# Altium PCB PCB1.PcbDoc (part 1 of 2)
Units mm, origin at the board's own origin, x right, y up, seen from the top; angles counter-clockwise.
Board outline 71.14 x 54.36 mm, 2 copper layers (Top Layer, Bottom Layer); 19 components, 50 nets, 188 pads, 100 vias.
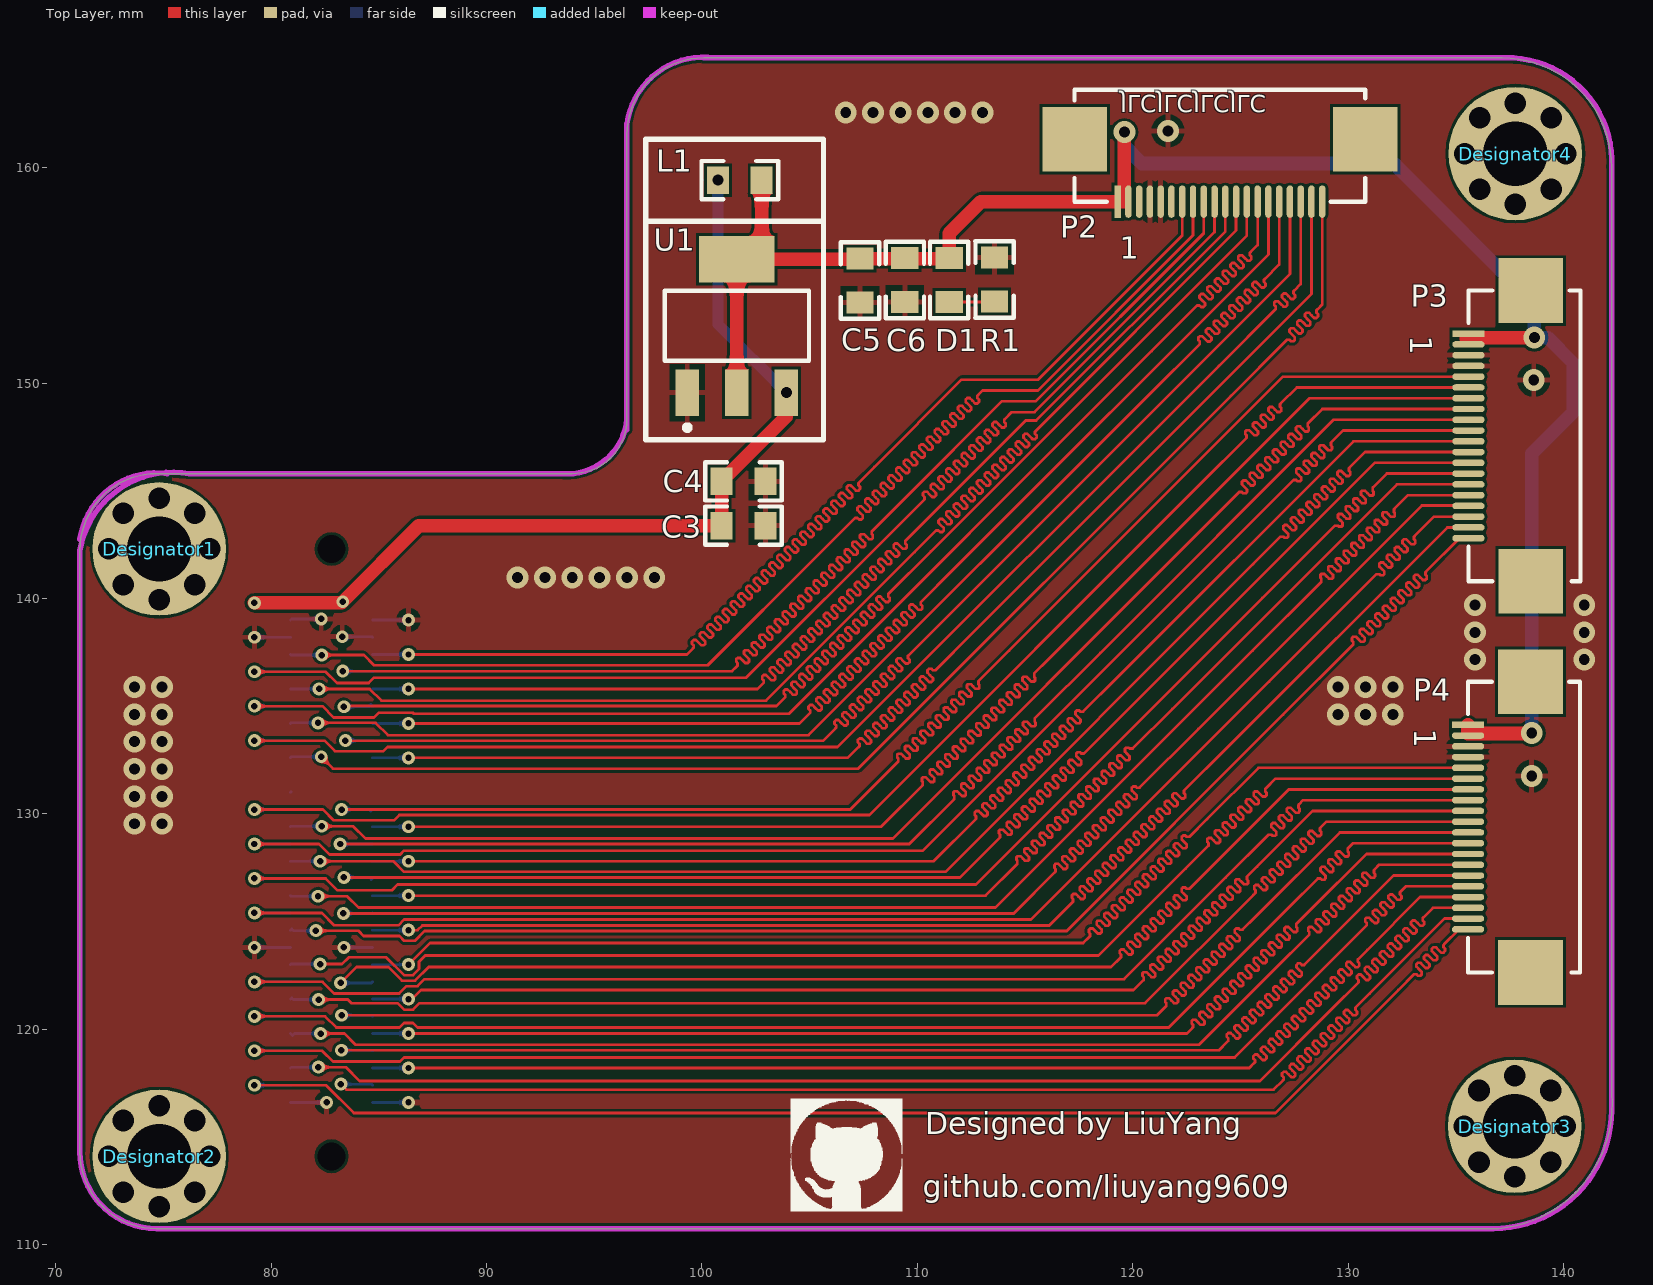
[diagram p0: Top Layer view]
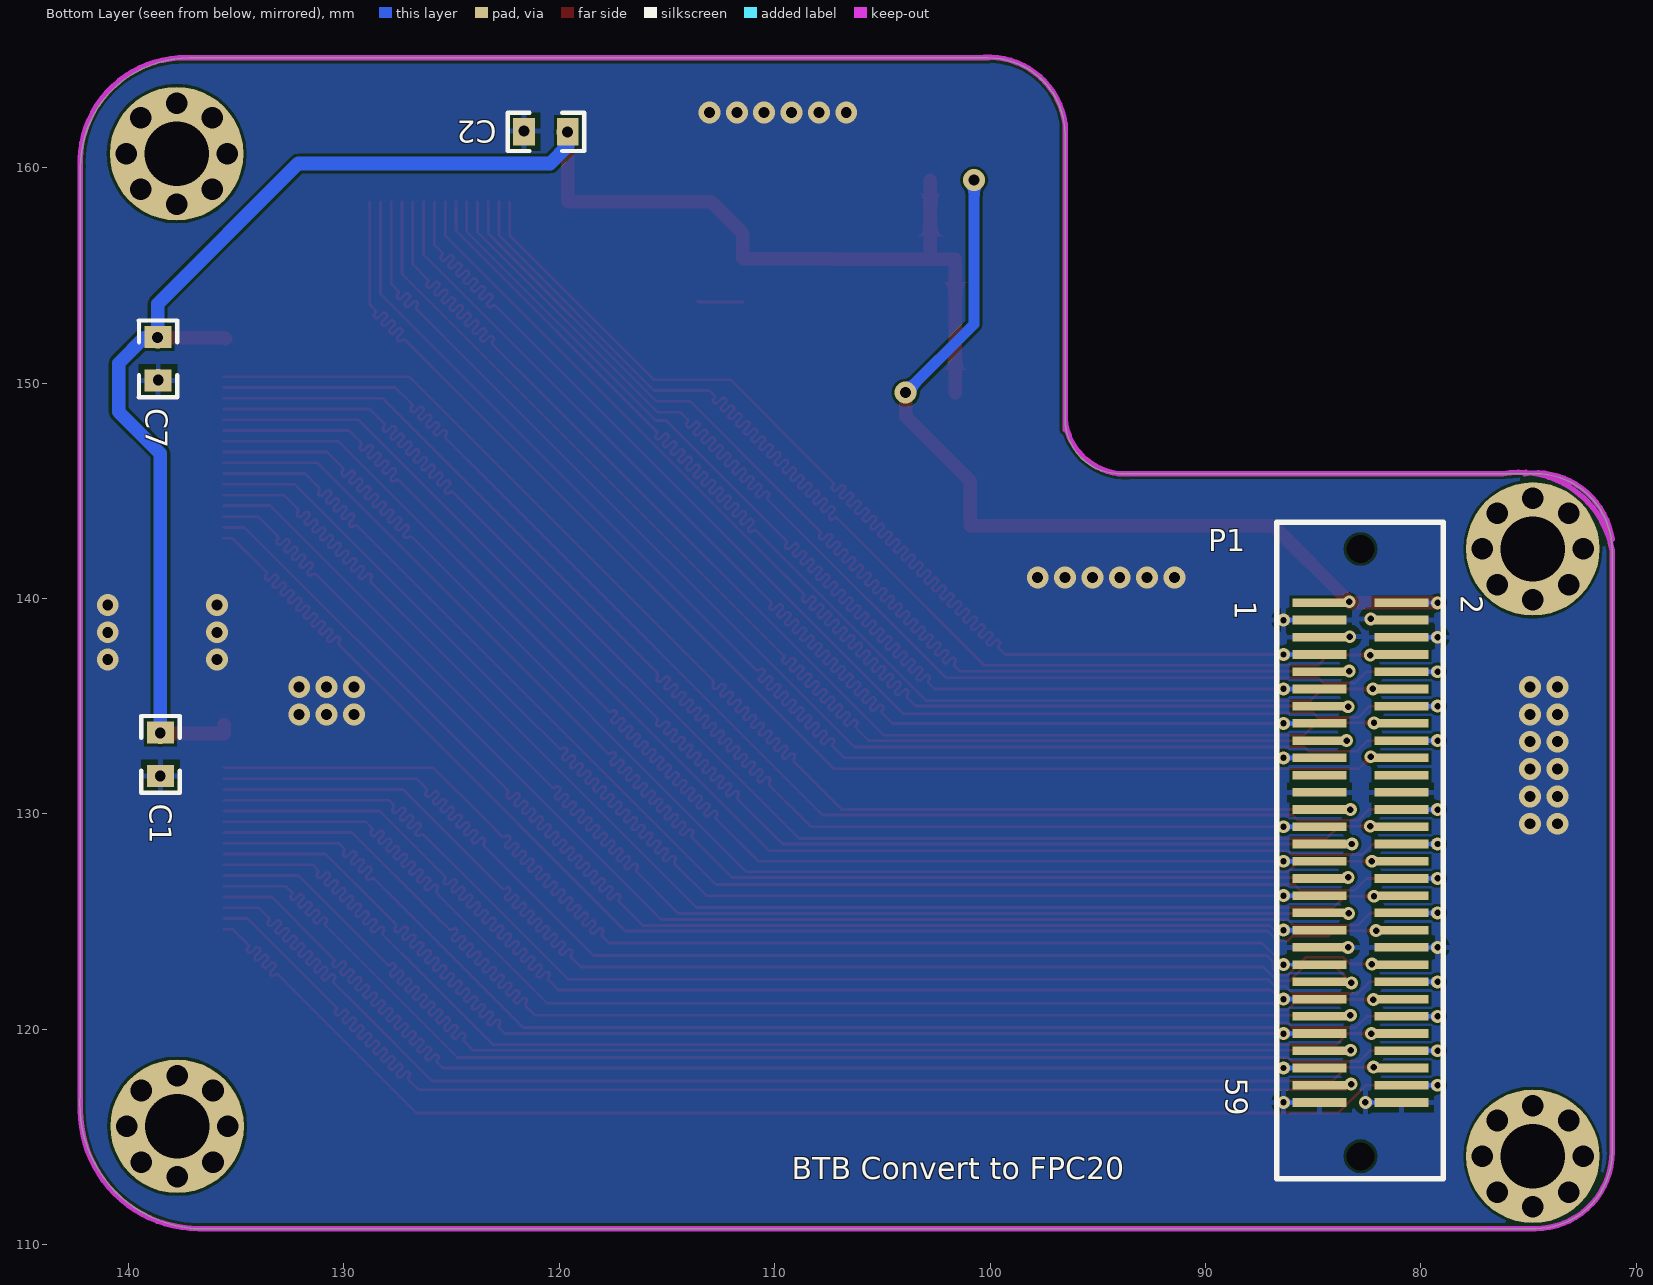
[diagram p1: Bottom Layer view, seen from below]
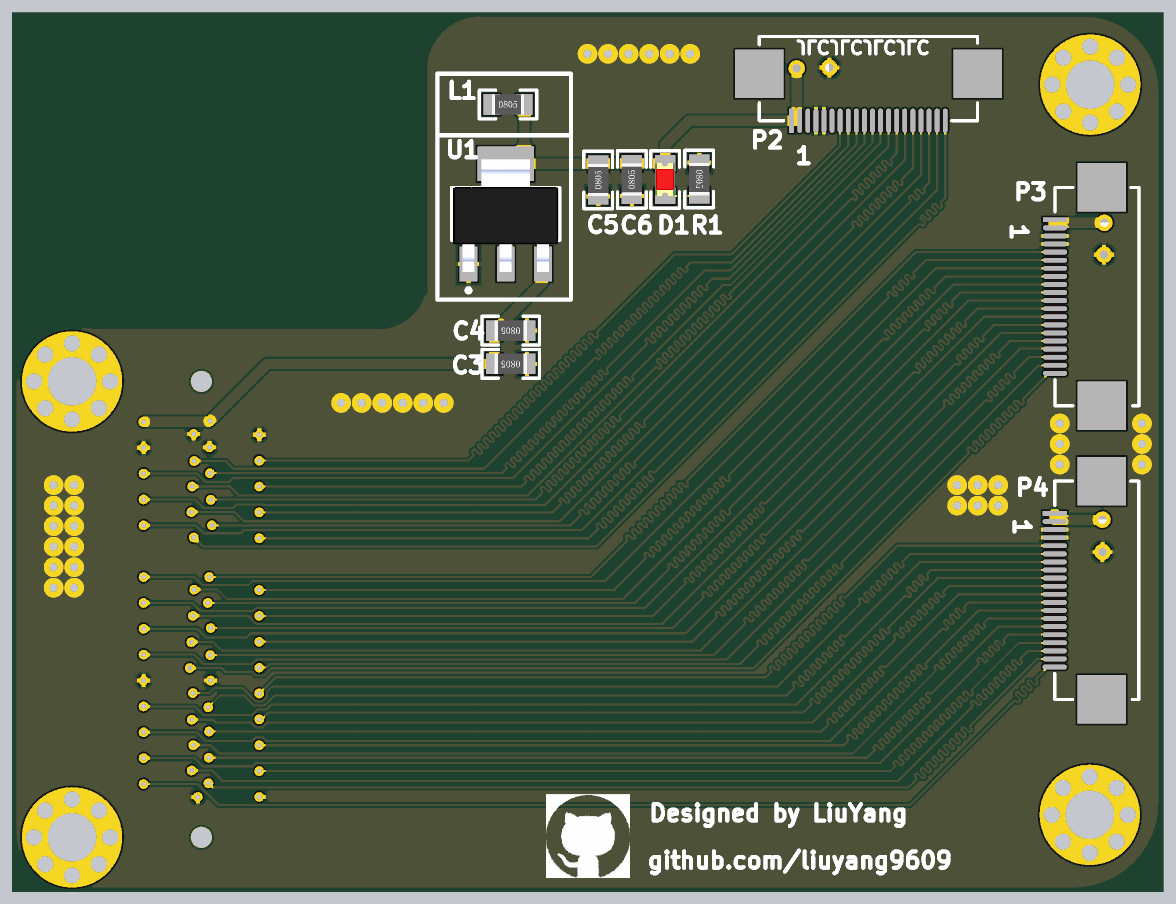
[diagram p3: 3D render of the assembled board from above, using the file's embedded part models]
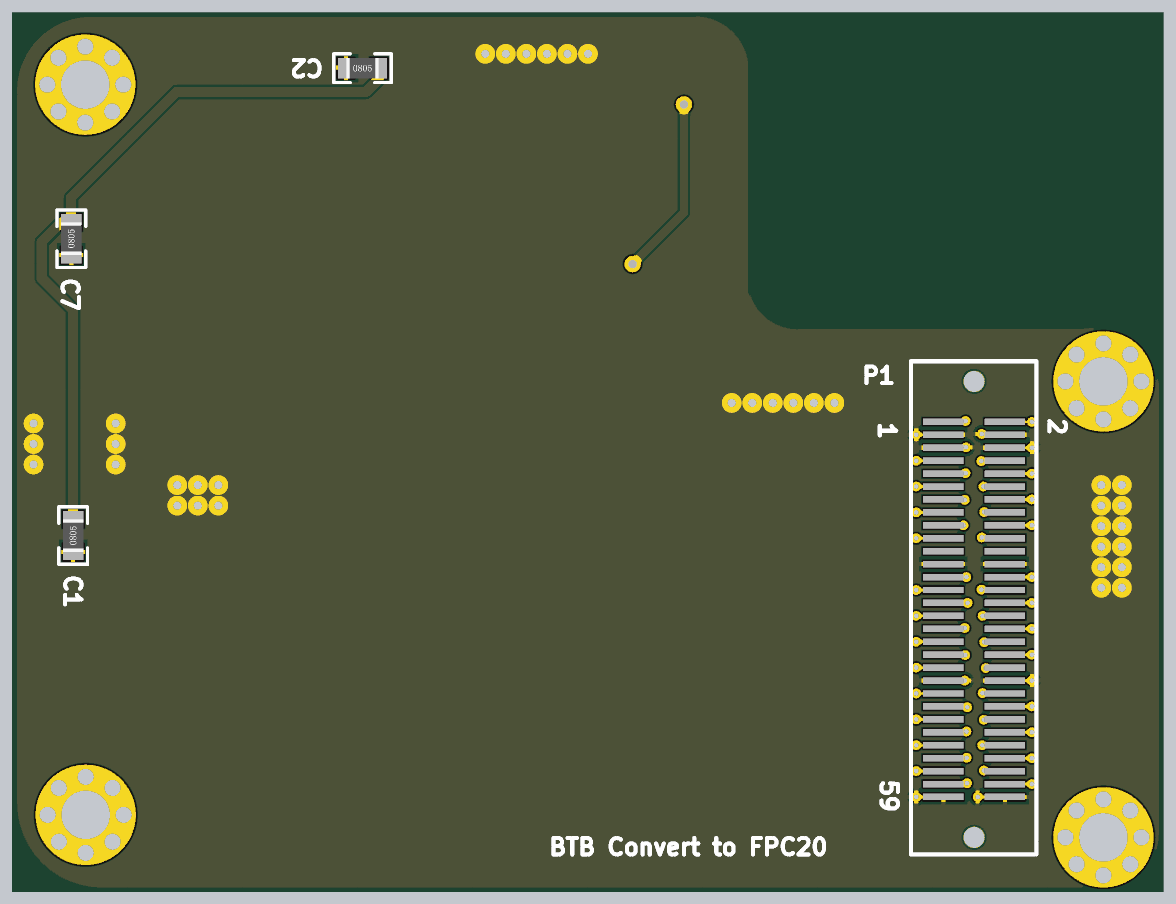
[diagram p4: 3D render of the assembled board from below, using the file's embedded part models]

## Layer stack, top to bottom
Top Solder: solder mask 0.0102, Solder Resist, Dk 3.5
Top Layer: signal copper 0.0356
Dielectric 1: dielectric 0.32, FR-4, Dk 4.8
Bottom Layer: signal copper 0.0356
Bottom Solder: solder mask 0.0102, Solder Resist, Dk 3.5

## Board outline
74.676,110.744 cw(c74.676,114.3) 71.12,114.3 71.12,142.24 cw(c74.676,142.24) 74.676,145.796 93.98,145.796 ccw(c93.98,148.336) 96.52,148.336 96.52,161.544 cw(c100.076,161.544) 100.076,165.1 137.16,165.1 cw(c137.16,160.02) 142.24,160.02 142.24,117 cw(c136.492,116.492) 137,110.744

## Design rules (kind name [scope] priority, off if disabled: settings)
Clearance [All] p1: gap=0.127
Length FPC3Length [InNetClass('FPC3')] p1: maxlimit=66 minlimit=65
Length FPC2 [InNetClass('FPC2')] p2: maxlimit=71 minlimit=70
Length FPC1_Length [InNetClass('FPC1')] p3: maxlimit=66 minlimit=65
PolygonConnect [All] p1: connectstyle=Relief reliefconductorwidth=0.254 reliefentries=4 polygonreliefangle="90 Angle" airgapwidth=0.254
RoutingVias [All] p1: holewidth=0.3 width=0.6 viastyle="Through Hole" minholewidth=0.3 minwidth=0.6 maxholewidth=100 maxwidth=100
SolderMaskExpansion [All] p1: expansion=0.102
Width [All] p1: maxlimit=1.27 minlimit=0.127 preferedwidth=0.127
30 further rules are at their usual default settings.

## Classes and differential pairs
component class Sheet1: C1 C2 C3 C4 C5 C6 C7 D1 L1 P1 P2 P4 R1 U1
net class FPC1: N17 N20 P18 P20 R18 T17 T20 U20 V20 W18 W19 W20 Y18 Y19
net class FPC2: N18 P15 P16 P19 R16 R17 T16 U17 U18 U19 V15 V16 V17 V18 W15 W16
net class FPC3: P14 R14 T10 T11 T12 T14 T15 U12 U14 U15 V12 W13 W14 Y14 Y16 Y17

## Components (designator, comment, footprint, x,y, rotation, side; value= is the part's Value field where it differs from the comment)
C1 "Cap" R0805 138.519,132.766 r90 bottom
C2 "Cap" R0805 120.625,161.671 r180 bottom
C3 "Cap" R0805 101.93,143.383 r180 top
C4 "Cap" R0805 101.93,145.44 r180 top
C5 "Cap" R0805 107.34,154.762 r90 top
C6 "Cap" R0805 109.423,154.788 r90 top
C7 "Cap" R0805 138.633,151.13 r90 bottom
D1 "LED" LED0805红 111.481,154.788 r270 top
Designator1 "Comment" 定位孔 74.8,142.3 r0 top
Designator2 "Comment" 定位孔 74.8,114.1 r0 top
Designator3 "Comment" 定位孔 137.744,115.494 r0 top
Designator4 "Comment" 定位孔 137.77,160.655 r0 top
L1 "Inductor" R0805 101.76,159.427 r0 top
P1 "BTB 30X2" BTBCON_0.8mm_60P 84.7,139.8 r180 bottom
P2 "FPC20P" FPC20Pin 119.303,158.427 r90 top
P3 "FPC20P" FPC20Pin 135.592,152.299 r0 top
P4 "FPC20P" FPC20Pin 135.575,134.136 r0 top
R1 "Res1" R0805 113.589,154.813 r270 top
U1 "AMS1117" "SOT-223   AMS1117" 101.62,152.658 r0 top

## Footprints (in the part's own frame and the unit in brackets; to place one, negate y for a bottom-side part, rotate by r counter-clockwise, add the part's x,y. Pads: shape width x height; smd on the part's side, far side on the other; paste and mask are expansions set on the pad)
BTBCON_0.8mm_60P [mm]
  rect 2.5x0.4 smd: 1(0,0) 2(3.8,0) 3(0,-0.8) 4(3.8,-0.8) 5(0,-1.6) 6(3.8,-1.6) 7(0,-2.4) 8(3.8,-2.4) 9(0,-3.2) 10(3.8,-3.2) 11(0,-4) 12(3.8,-4) 13(0,-4.8) 14(3.8,-4.8) 15(0,-5.6) 16(3.8,-5.6) 17(0,-6.4) 18(3.8,-6.4) 19(0,-7.2) 20(3.8,-7.2) 21(0,-8) 22(3.8,-8) 23(0,-8.8) 24(3.8,-8.8) 25(0,-9.6) 26(3.8,-9.6) 27(0,-10.4) 28(3.8,-10.4) 29(0,-11.2) 30(3.8,-11.2) 31(0,-12) 32(3.8,-12) 33(0,-12.8) 34(3.8,-12.8) 35(0,-13.6) 36(3.8,-13.6) 37(0,-14.4) 38(3.8,-14.4) 39(0,-15.2) 40(3.8,-15.2) 41(0,-16) 42(3.8,-16) 43(0,-16.8) 44(3.8,-16.8) 45(0,-17.6) 46(3.8,-17.6) 47(0,-18.4) 48(3.8,-18.4) 49(0,-19.2) 50(3.8,-19.2) 51(0,-20) 52(3.8,-20) 53(0,-20.8) 54(3.8,-20.8) 55(0,-21.6) 56(3.8,-21.6) 57(0,-22.4) 58(3.8,-22.4) 59(0,-23.2) 60(3.8,-23.2)
  round 1 hole 1.3: 61(1.9,2.5) 62(1.9,-25.7)
  silkscreen extent -2,-26.75 5.75,3.75
FPC20Pin [mm]
  rect 1.5x0.3 smd: 1(0,0)
  oval 1.5x0.3 smd: 2(0,-0.5) 3(0,-1) 4(0,-1.5) 5(0,-2) 6(0,-2.5) 7(0,-3) 8(0,-3.5) 9(0,-4) 10(0,-4.5) 11(0,-5) 12(0,-5.5) 13(0,-6) 14(0,-6.5) 15(0,-7) 16(0,-7.5) 17(0,-8) 18(0,-8.5) 19(0,-9) 20(0,-9.5)
  rect 3x3 smd: 21(2.9,2) 22(2.9,-11.5)
  silkscreen extent 0,-11.5 5.2,2
LED0805红 [mil]
  rect 40x50 smd: 1(-40,0) 2(40,0)
  silkscreen extent -70,-35 70,35, body extent -40,-25 40,24, height 43
R0805 [mil]
  rect 40x50 smd: 1(-40,0) 2(40,0)
  silkscreen extent -70,-35 70,35, body extent -39,-25 39,25, height 22
"SOT-223   AMS1117" [mm] "SOT-223/SC-73; 4 Leads; Body 6.7 x 7.3 mm, inc. leads (LxW max)"
  rect 1.1x2.15 smd: 1(-2.3,-3.1) 2(0,-3.1) 3(2.3,-3.1)
  rect 3.5x2.15 smd: 4(0,3.1)
  silkscreen extent -3.35,-4.85 3.35,1.63, body extent -3.25,-3.58 3.25,3.38, height 1.65
定位孔 [mm]
  round 1 hole 1: 1(-2.35,0) 1(-1.662,-1.662) 1(-1.662,1.662) 1(0,-2.35) 1(0,2.35) 1(1.662,-1.662) 1(1.662,1.662) 1(2.35,0)
  round 6.2 hole 3: 1(0,0)

## Part data
C1 C2 C3 C4 C5 C6 C7: "Capacitor"
D1: library part LED0, "Typical INFRARED GaAs LED"
P1: library part "Header 30X2", "Header, 30-Pin, Dual row"
P2 P3 P4: library part "Header 22", "Header, 22-Pin"
R1: "Resistor"

## Via types
v1: diameter 0.6, hole 0.3, Top Layer to Bottom Layer, 56 vias
v2: diameter 1.016, hole 0.508, Top Layer to Bottom Layer, 44 vias

## Nets (pads, with @x,y where several pads share a name; then routed paths per layer and width w, separated by ;. In a path a pad name is that pad's centre, name@x,y a point inside that pad or via, vN(x,y) a via of type N, cw(c..) or ccw(c..) an arc to the next point about the centre after c; other vN are vias at no path point)
DGND: C1.1 C2.1 C3.1 C4.1 C5.1 C6.1 C7.1 P1.3 P1.4 P1.5 P1.6 P1.23 P1.24 P1.41 P1.42 P1.59 P1.60 P2.4 P2.5 P3.3 P3.4 P4.3 P4.4 R1.1 U1.1 | length 12.6
  Bottom Layer w0.127: v1(79.223,123.8) P1.42@80.9,123.8 ; v1(79.223,138.2) P1.6@80.9,138.2 ; P1.60@80.9,116.6 v1(82.577,116.6) ; P1.24@80.9,131 P1.24@80.925,131.025 ; P1.4@80.9,139 80.95,139.05 v1(82.325,139.05) ; v1(83.3,138.225) 84.675,138.225 P1.5@84.7,138.2 ; v1(83.375,123.8) P1.41@84.7,123.8 ; P1.59@84.7,116.6 v1(86.377,116.6) ; P1.3@84.7,139 v1(86.377,139)
  other v2: 73.66,129.54 74.93,129.54 73.66,130.81 74.93,130.81 138.531,131.752 73.66,132.08 74.93,132.08 73.66,133.35 74.93,133.35 73.66,134.62 74.93,134.62 129.54,134.62 130.81,134.62 132.08,134.62 73.66,135.89 74.93,135.89 129.54,135.89 130.81,135.89 132.08,135.89 135.89,137.16 140.97,137.16 135.89,138.43 140.97,138.43 135.89,139.7 140.97,139.7 91.44,140.97 92.71,140.97 93.98,140.97 95.25,140.97 96.52,140.97 97.79,140.97 138.624,150.137 121.641,161.709 106.68,162.56 107.95,162.56 109.22,162.56 110.49,162.56 111.76,162.56 113.03,162.56
N17: P1.15 P2.15 | length 64.7
  Top Layer w0.127: v1(86.377,134.2) 104.533,134.2 104.991,134.658 105.027,134.694 105.027,134.802 104.955,134.874 104.955,134.981 105.027,135.053 105.135,135.053 105.26,134.928 105.386,134.802 105.494,134.802 105.566,134.874 105.566,134.981 105.44,135.107 105.314,135.233 105.314,135.341 105.386,135.412 105.494,135.412 105.62,135.287 105.745,135.161 105.853,135.161 105.925,135.233 105.925,135.341 105.799,135.466 105.673,135.592 105.673,135.7 105.745,135.772 105.853,135.772 105.979,135.646 106.104,135.52 106.212,135.52 106.284,135.592 106.284,135.7 106.158,135.826 106.033,135.951 106.033,136.059 106.104,136.131 106.212,136.131 106.338,136.005 106.464,135.879 106.571,135.879 106.643,135.951 106.643,136.059 106.518,136.185 106.392,136.31 106.392,136.418 106.464,136.49 106.571,136.49 106.697,136.364 106.823,136.239 106.931,136.239 107.002,136.31 107.002,136.418 106.877,136.544 106.751,136.67 106.751,136.777 106.823,136.849 106.931,136.849 107.056,136.724 107.182,136.598 107.29,136.598 107.362,136.67 107.362,136.777 107.236,136.903 107.11,137.029 107.11,137.137 107.182,137.208 107.29,137.208 107.416,137.083 107.541,136.957 107.649,136.957 107.721,137.029 107.721,137.137 107.595,137.262 107.469,137.388 107.469,137.496 107.541,137.568 107.649,137.568 107.775,137.442 107.901,137.316 108.008,137.316 108.08,137.388 108.08,137.496 107.954,137.622 107.829,137.747 107.829,137.855 107.901,137.927 108.008,137.927 108.134,137.801 108.26,137.675 108.367,137.675 108.439,137.747 108.439,137.855 108.314,137.981 108.188,138.107 108.188,138.214 108.26,138.286 108.367,138.286 108.493,138.16 108.619,138.035 108.727,138.035 108.799,138.107 108.799,138.214 108.673,138.34 108.547,138.466 108.547,138.573 108.619,138.645 108.727,138.645 108.852,138.52 108.978,138.394 109.086,138.394 109.158,138.466 109.158,138.573 109.032,138.699 108.906,138.825 108.906,138.933 108.978,139.005 109.086,139.005 109.212,138.879 109.337,138.753 109.445,138.753 109.517,138.825 109.517,138.933 109.391,139.058 109.266,139.184 109.266,139.292 109.337,139.364 109.445,139.364 109.571,139.238 109.697,139.112 109.804,139.112 109.876,139.184 109.876,139.292 109.75,139.418 109.625,139.543 109.625,139.651 109.697,139.723 109.804,139.723 109.93,139.597 110.056,139.472 110.164,139.472 110.235,139.543 110.235,139.651 110.164,139.723 110.164,139.831 111.671,141.338 126.303,155.971 P2.15@126.303,158.427
  Bottom Layer w0.127: P1.15@84.7,134.2 v1(86.377,134.2)
N18: P1.29 P3.9 | length 69.7
  Top Layer w0.127: v1(83.2,128.6) 109.626,128.6 111.697,130.67 111.714,130.688 111.714,130.832 111.679,130.868 111.679,131.012 111.714,131.047 111.858,131.047 111.966,130.94 112.074,130.832 112.217,130.832 112.253,130.868 112.253,131.012 112.146,131.119 112.038,131.227 112.038,131.371 112.074,131.407 112.217,131.407 112.325,131.299 112.433,131.191 112.577,131.191 112.612,131.227 112.612,131.371 112.505,131.479 112.397,131.586 112.397,131.73 112.433,131.766 112.577,131.766 112.684,131.658 112.792,131.55 112.936,131.55 112.972,131.586 112.972,131.73 112.864,131.838 112.756,131.945 112.756,132.089 112.792,132.125 112.936,132.125 113.044,132.017 113.151,131.91 113.295,131.91 113.331,131.945 113.331,132.089 113.223,132.197 113.115,132.305 113.115,132.448 113.151,132.484 113.295,132.484 113.403,132.377 113.511,132.269 113.654,132.269 113.69,132.305 113.69,132.448 113.582,132.556 113.475,132.664 113.475,132.808 113.511,132.844 113.654,132.844 113.762,132.736 113.87,132.628 114.013,132.628 114.049,132.664 114.049,132.808 113.942,132.915 113.834,133.023 113.834,133.167 113.87,133.203 114.013,133.203 114.121,133.095 114.229,132.987 114.373,132.987 114.409,133.023 114.409,133.167 114.301,133.275 114.193,133.382 114.193,133.526 114.229,133.562 114.373,133.562 114.48,133.454 114.588,133.346 114.732,133.346 114.768,133.382 114.768,133.526 114.66,133.634 114.552,133.742 114.552,133.885 114.588,133.921 114.732,133.921 114.84,133.813 114.947,133.706 115.091,133.706 115.127,133.742 115.127,133.885 115.019,133.993 114.911,134.101 114.911,134.244 114.947,134.28 115.091,134.28 115.199,134.173 115.307,134.065 115.45,134.065 115.486,134.101 115.486,134.244 115.45,134.28 115.45,134.424 118.504,137.477 129.325,148.299 P3.9@135.592,148.299
  Bottom Layer w0.127: v1(83.2,128.6) P1.29@84.7,128.6
N20: P1.7 P2.7 | length 64.7
  Top Layer w0.127: v1(86.377,137.4) 99.3,137.4 99.581,137.681 99.617,137.717 99.617,137.824 99.545,137.896 99.545,138.004 99.617,138.076 99.724,138.076 99.85,137.95 99.976,137.824 100.084,137.824 100.155,137.896 100.155,138.004 100.03,138.13 99.904,138.255 99.904,138.363 99.976,138.435 100.084,138.435 100.209,138.309 100.335,138.184 100.443,138.184 100.515,138.255 100.515,138.363 100.389,138.489 100.263,138.615 100.263,138.722 100.335,138.794 100.443,138.794 100.569,138.669 100.694,138.543 100.802,138.543 100.874,138.615 100.874,138.722 100.748,138.848 100.622,138.974 100.622,139.082 100.694,139.153 100.802,139.153 100.928,139.028 101.053,138.902 101.161,138.902 101.233,138.974 101.233,139.082 101.107,139.207 100.982,139.333 100.982,139.441 101.053,139.513 101.161,139.513 101.287,139.387 101.413,139.261 101.52,139.261 101.592,139.333 101.592,139.441 101.467,139.567 101.341,139.692 101.341,139.8 101.413,139.872 101.52,139.872 101.646,139.746 101.772,139.62 101.88,139.62 101.951,139.692 101.951,139.8 101.826,139.926 101.7,140.051 101.7,140.159 101.772,140.231 101.88,140.231 102.005,140.105 102.131,139.98 102.239,139.98 102.311,140.051 102.311,140.159 102.185,140.285 102.059,140.411 102.059,140.518 102.131,140.59 102.239,140.59 102.365,140.465 102.49,140.339 102.598,140.339 102.67,140.411 102.67,140.518 102.544,140.644 102.418,140.77 102.418,140.878 102.49,140.95 102.598,140.95 102.724,140.824 102.85,140.698 102.957,140.698 103.029,140.77 103.029,140.878 102.903,141.003 102.778,141.129 102.778,141.237 102.85,141.309 102.957,141.309 103.083,141.183 103.209,141.057 103.316,141.057 103.388,141.129 103.388,141.237 103.263,141.363 103.137,141.488 103.137,141.596 103.209,141.668 103.316,141.668 103.442,141.542 103.568,141.416 103.676,141.416 103.748,141.488 103.748,141.596 103.622,141.722 103.496,141.848 103.496,141.955 103.568,142.027 103.676,142.027 103.801,141.901 103.927,141.776 104.035,141.776 104.107,141.848 104.107,141.955 103.981,142.081 103.855,142.207 103.855,142.315 103.927,142.386 104.035,142.386 104.161,142.261 104.286,142.135 104.394,142.135 104.466,142.207 104.466,142.315 104.34,142.44 104.215,142.566 104.215,142.674 104.286,142.746 104.394,142.746 104.52,142.62 104.646,142.494 104.753,142.494 104.825,142.566 104.825,142.674 104.699,142.799 104.574,142.925 104.574,143.033 104.646,143.105 104.753,143.105 104.879,142.979 105.005,142.853 105.113,142.853 105.184,142.925 105.184,143.033 105.059,143.159 104.933,143.284 104.933,143.392 105.005,143.464 105.113,143.464 105.238,143.338 105.364,143.213 105.472,143.213 105.544,143.284 105.544,143.392 105.418,143.518 105.292,143.644 105.292,143.751 105.364,143.823 105.472,143.823 105.597,143.697 105.723,143.572 105.831,143.572 105.903,143.644 105.903,143.751 105.777,143.877 105.651,144.003 105.651,144.111 105.723,144.182 105.831,144.182 105.957,144.057 106.082,143.931 106.19,143.931 106.262,144.003 106.262,144.111 106.136,144.236 106.011,144.362 106.011,144.47 106.082,144.542 106.19,144.542 106.316,144.416 106.442,144.29 106.549,144.29 106.621,144.362 106.621,144.47 106.495,144.595 106.37,144.721 106.37,144.829 106.442,144.901 106.549,144.901 106.675,144.775 106.801,144.649 106.909,144.649 106.98,144.721 106.98,144.829 106.855,144.955 106.729,145.08 106.729,145.188 106.801,145.26 106.909,145.26 107.034,145.134 107.16,145.009 107.268,145.009 107.34,145.08 107.34,145.188 107.268,145.26 107.268,145.368 108.013,146.113 112.062,150.162 115.618,150.162 122.303,156.847 P2.7@122.303,158.427
  Bottom Layer w0.127: P1.7@84.7,137.4 v1(86.377,137.4)
NetD1_2: D1.2 R1.2 | length 2.1
  Top Layer w0.127: D1.2@111.481,153.772 113.563,153.772 R1.2@113.589,153.797
P14: P1.45 P4.7 | length 64.9
  Top Layer w0.127: v1(83.225,122.15) 83.96,122.885 85.439,122.885 86.069,122.255 86.685,122.255 87.315,122.885 118.999,122.885 119.431,123.317 119.458,123.344 119.458,123.47 119.404,123.524 119.404,123.649 119.458,123.703 119.583,123.703 119.7,123.586 119.817,123.47 119.943,123.47 119.997,123.524 119.997,123.649 119.88,123.766 119.763,123.883 119.763,124.008 119.817,124.062 119.943,124.062 120.059,123.946 120.176,123.829 120.302,123.829 120.356,123.883 120.356,124.008 120.239,124.125 120.122,124.242 120.122,124.368 120.176,124.422 120.302,124.422 120.419,124.305 120.535,124.188 120.661,124.188 120.715,124.242 120.715,124.368 120.598,124.484 120.481,124.601 120.481,124.727 120.535,124.781 120.661,124.781 120.778,124.664 120.895,124.547 121.02,124.547 121.074,124.601 121.074,124.727 120.957,124.844 120.841,124.96 120.841,125.086 120.895,125.14 121.02,125.14 121.137,125.023 121.254,124.907 121.38,124.907 121.433,124.96 121.433,125.086 121.317,125.203 121.2,125.32 121.2,125.445 121.254,125.499 121.38,125.499 121.496,125.382 121.613,125.266 121.739,125.266 121.793,125.32 121.793,125.445 121.676,125.562 121.559,125.679 121.559,125.805 121.613,125.858 121.739,125.858 121.855,125.742 121.972,125.625 122.098,125.625 122.152,125.679 122.152,125.805 122.035,125.921 121.918,126.038 121.918,126.164 121.972,126.218 122.098,126.218 122.215,126.101 122.331,125.984 122.457,125.984 122.511,126.038 122.511,126.164 122.394,126.28 122.278,126.397 122.278,126.523 122.331,126.577 122.457,126.577 122.511,126.523 122.637,126.523 123.952,127.838 127.25,131.136 P4.7@135.575,131.136
  Bottom Layer w0.127: v1(83.225,122.15) 84.65,122.15 P1.45@84.7,122.2
P15: P1.31 P3.11 | length 69.8
  Top Layer w0.127: v1(86.377,127.8) 110.757,127.8 112.7,129.743 112.727,129.77 112.727,129.896 112.673,129.95 112.673,130.075 112.727,130.129 112.852,130.129 112.969,130.013 113.086,129.896 113.212,129.896 113.266,129.95 113.266,130.075 113.149,130.192 113.032,130.309 113.032,130.435 113.086,130.489 113.212,130.489 113.328,130.372 113.445,130.255 113.571,130.255 113.625,130.309 113.625,130.435 113.508,130.551 113.391,130.668 113.391,130.794 113.445,130.848 113.571,130.848 113.688,130.731 113.804,130.614 113.93,130.614 113.984,130.668 113.984,130.794 113.867,130.911 113.75,131.027 113.75,131.153 113.804,131.207 113.93,131.207 114.047,131.09 114.164,130.973 114.289,130.973 114.343,131.027 114.343,131.153 114.226,131.27 114.11,131.387 114.11,131.512 114.164,131.566 114.289,131.566 114.406,131.449 114.523,131.333 114.649,131.333 114.702,131.387 114.702,131.512 114.586,131.629 114.469,131.746 114.469,131.872 114.523,131.925 114.649,131.925 114.765,131.809 114.882,131.692 115.008,131.692 115.062,131.746 115.062,131.872 114.945,131.988 114.828,132.105 114.828,132.231 114.882,132.285 115.008,132.285 115.124,132.168 115.241,132.051 115.367,132.051 115.421,132.105 115.421,132.231 115.304,132.347 115.187,132.464 115.187,132.59 115.241,132.644 115.367,132.644 115.484,132.527 115.6,132.41 115.726,132.41 115.78,132.464 115.78,132.59 115.663,132.707 115.547,132.823 115.547,132.949 115.6,133.003 115.726,133.003 115.843,132.886 115.96,132.77 116.085,132.77 116.139,132.823 116.139,132.949 116.022,133.066 115.906,133.183 115.906,133.308 115.96,133.362 116.085,133.362 116.202,133.245 116.319,133.129 116.445,133.129 116.498,133.183 116.498,133.308 116.382,133.425 116.265,133.542 116.265,133.668 116.319,133.721 116.445,133.721 116.561,133.605 116.678,133.488 116.804,133.488 116.858,133.542 116.858,133.668 116.741,133.784 116.624,133.901 116.624,134.027 116.678,134.081 116.804,134.081 116.921,133.964 117.037,133.847 117.163,133.847 117.217,133.901 117.217,134.027 117.1,134.144 116.983,134.26 116.983,134.386 117.037,134.44 117.163,134.44 117.28,134.323 117.396,134.206 117.522,134.206 117.576,134.26 117.576,134.386 117.459,134.503 117.343,134.619 117.343,134.745 117.396,134.799 117.522,134.799 117.576,134.745 117.702,134.745 119.278,136.322 130.255,147.299 P3.11@135.592,147.299
  Bottom Layer w0.127: P1.31@84.7,127.8 v1(86.377,127.8)
P16: P1.32 P3.12 | length 69.7
  Top Layer w0.127: v1(82.275,127.8) 85.683,127.8 86.174,127.309 111.307,127.309 125.59,141.592 126.867,142.869 126.993,142.869 127.047,142.816 127.173,142.816 127.227,142.869 127.227,142.995 127.11,143.112 126.993,143.229 126.993,143.354 127.047,143.408 127.173,143.408 127.29,143.292 127.406,143.175 127.532,143.175 127.586,143.229 127.586,143.354 127.469,143.471 127.352,143.588 127.352,143.714 127.406,143.767 127.532,143.767 127.649,143.651 127.765,143.534 127.891,143.534 127.945,143.588 127.945,143.714 127.828,143.83 127.712,143.947 127.712,144.073 127.765,144.127 127.891,144.127 128.008,144.01 128.125,143.893 128.25,143.893 128.304,143.947 128.304,144.073 128.188,144.19 128.071,144.306 128.071,144.432 128.125,144.486 128.25,144.486 128.367,144.369 128.484,144.252 128.61,144.252 128.663,144.306 128.663,144.432 128.547,144.549 128.43,144.665 128.43,144.791 128.484,144.845 128.61,144.845 128.726,144.728 128.843,144.612 128.969,144.612 129.023,144.665 129.023,144.791 128.906,144.908 128.789,145.025 128.789,145.15 128.843,145.204 128.969,145.204 129.086,145.088 129.202,144.971 129.328,144.971 129.382,145.025 129.382,145.15 129.265,145.267 129.148,145.384 129.148,145.51 129.202,145.564 129.328,145.564 129.445,145.447 129.562,145.33 129.687,145.33 129.741,145.384 129.741,145.51 129.624,145.626 129.508,145.743 129.508,145.869 129.562,145.923 129.687,145.923 129.804,145.806 129.921,145.689 130.046,145.689 130.1,145.743 130.1,145.869 130.046,145.923 130.046,146.048 130.073,146.075 130.797,146.799 P3.12@135.592,146.799
  Bottom Layer w0.127: P1.32@80.9,127.8 v1(82.275,127.8)
P18: P1.16 P2.16 | length 64.7
  Top Layer w0.127: v1(82.175,134.225) 84.854,134.225 85.425,133.654 104.952,133.654 120.828,149.53 123.119,151.821 123.119,151.929 123.047,152.001 123.047,152.108 123.119,152.18 123.227,152.18 123.353,152.055 123.478,151.929 123.586,151.929 123.658,152.001 123.658,152.108 123.532,152.234 123.406,152.36 123.406,152.468 123.478,152.539 123.586,152.539 123.712,152.414 123.837,152.288 123.945,152.288 124.017,152.36 124.017,152.468 123.891,152.593 123.766,152.719 123.766,152.827 123.837,152.899 123.945,152.899 124.071,152.773 124.197,152.647 124.304,152.647 124.376,152.719 124.376,152.827 124.251,152.953 124.125,153.078 124.125,153.186 124.197,153.258 124.304,153.258 124.43,153.132 124.556,153.006 124.664,153.006 124.735,153.078 124.735,153.186 124.61,153.312 124.484,153.437 124.484,153.545 124.556,153.617 124.664,153.617 124.789,153.491 124.915,153.366 125.023,153.366 125.095,153.437 125.095,153.545 124.969,153.671 124.843,153.797 124.843,153.904 124.915,153.976 125.023,153.976 125.149,153.851 125.274,153.725 125.382,153.725 125.454,153.797 125.454,153.904 125.328,154.03 125.202,154.156 125.202,154.264 125.274,154.336 125.382,154.336 125.508,154.21 125.634,154.084 125.741,154.084 125.813,154.156 125.813,154.264 125.687,154.389 125.562,154.515 125.562,154.623 125.634,154.695 125.741,154.695 125.867,154.569 125.993,154.443 126.1,154.443 126.172,154.515 126.172,154.623 126.1,154.695 126.1,154.802 126.136,154.838 126.803,155.505 P2.16@126.803,158.427
  Bottom Layer w0.127: P1.16@80.9,134.2 80.925,134.225 v1(82.175,134.225)
P19: P1.30 P3.10 | length 69.9
  Top Layer w0.127: v1(79.223,128.6) 82.219,128.6 82.71,128.109 85.993,128.109 86.174,128.29 110.256,128.29 125.349,143.383 127.466,145.5 127.592,145.5 127.646,145.446 127.771,145.446 127.825,145.5 127.825,145.626 127.709,145.743 127.592,145.859 127.592,145.985 127.646,146.039 127.771,146.039 127.888,145.922 128.005,145.805 128.131,145.805 128.185,145.859 128.185,145.985 128.068,146.102 127.951,146.219 127.951,146.344 128.005,146.398 128.131,146.398 128.247,146.281 128.364,146.165 128.49,146.165 128.544,146.219 128.544,146.344 128.427,146.461 128.31,146.578 128.31,146.703 128.364,146.757 128.49,146.757 128.607,146.641 128.723,146.524 128.849,146.524 128.903,146.578 128.903,146.703 128.786,146.82 128.669,146.937 128.669,147.063 128.723,147.117 128.849,147.117 128.966,147 129.083,146.883 129.208,146.883 129.262,146.937 129.262,147.063 129.208,147.117 129.208,147.242 129.235,147.269 129.765,147.799 P3.10@135.592,147.799
  Bottom Layer w0.127: v1(79.223,128.6) P1.30@80.9,128.6
P20: P1.8 P2.8 | length 64.8
  Top Layer w0.127: v1(82.35,137.375) 84.304,137.375 84.779,136.9 100.273,136.9 105.461,142.088 107.115,143.742 107.223,143.742 107.295,143.67 107.403,143.67 107.475,143.742 107.475,143.85 107.349,143.976 107.223,144.101 107.223,144.209 107.295,144.281 107.403,144.281 107.528,144.155 107.654,144.03 107.762,144.03 107.834,144.101 107.834,144.209 107.708,144.335 107.582,144.461 107.582,144.568 107.654,144.64 107.762,144.64 107.888,144.514 108.013,144.389 108.121,144.389 108.193,144.461 108.193,144.568 108.067,144.694 107.942,144.82 107.942,144.928 108.013,144.999 108.121,144.999 108.247,144.874 108.373,144.748 108.48,144.748 108.552,144.82 108.552,144.928 108.426,145.053 108.301,145.179 108.301,145.287 108.373,145.359 108.48,145.359 108.606,145.233 108.732,145.107 108.84,145.107 108.911,145.179 108.911,145.287 108.786,145.412 108.66,145.538 108.66,145.646 108.732,145.718 108.84,145.718 108.965,145.592 109.091,145.466 109.199,145.466 109.271,145.538 109.271,145.646 109.145,145.772 109.019,145.897 109.019,146.005 109.091,146.077 109.199,146.077 109.325,145.951 109.45,145.826 109.558,145.826 109.63,145.897 109.63,146.005 109.504,146.131 109.378,146.257 109.378,146.364 109.45,146.436 109.558,146.436 109.684,146.311 109.809,146.185 109.917,146.185 109.989,146.257 109.989,146.364 109.863,146.49 109.738,146.616 109.738,146.724 109.809,146.795 109.917,146.795 110.043,146.67 110.169,146.544 110.276,146.544 110.348,146.616 110.348,146.724 110.223,146.849 110.097,146.975 110.097,147.083 110.169,147.155 110.276,147.155 110.402,147.029 110.528,146.903 110.636,146.903 110.707,146.975 110.707,147.083 110.582,147.209 110.456,147.334 110.456,147.442 110.528,147.514 110.636,147.514 110.761,147.388 110.887,147.262 110.995,147.262 111.067,147.334 111.067,147.442 110.941,147.568 110.815,147.693 110.815,147.801 110.887,147.873 110.995,147.873 111.121,147.747 111.246,147.622 111.354,147.622 111.426,147.693 111.426,147.801 111.3,147.927 111.174,148.053 111.174,148.16 111.246,148.232 111.354,148.232 111.48,148.107 111.605,147.981 111.713,147.981 111.785,148.053 111.785,148.16 111.659,148.286 111.534,148.412 111.534,148.52 111.605,148.591 111.713,148.591 111.839,148.466 111.965,148.34 112.072,148.34 112.144,148.412 112.144,148.52 112.019,148.645 111.893,148.771 111.893,148.879 111.965,148.951 112.072,148.951 112.198,148.825 112.324,148.699 112.432,148.699 112.504,148.771 112.504,148.879 112.378,149.005 112.252,149.13 112.252,149.238 112.324,149.31 112.432,149.31 112.557,149.184 112.683,149.058 112.791,149.058 112.863,149.13 112.863,149.238 112.791,149.31 112.791,149.418 112.827,149.454 113.036,149.662 115.601,149.662 122.803,156.865 P2.8@122.803,158.427
  Bottom Layer w0.127: P1.8@80.9,137.4 80.925,137.375 v1(82.35,137.375)
R14: P1.46 P4.8 | length 64.7
  Top Layer w0.127: v1(79.223,122.2) 82.379,122.2 82.92,121.66 85.943,121.66 86.285,122.001 86.791,122.001 87.116,122.326 119.609,122.326 124.32,127.038 126.314,129.032 126.44,129.032 126.494,128.978 126.619,128.978 126.673,129.032 126.673,129.158 126.556,129.274 126.44,129.391 126.44,129.517 126.494,129.571 126.619,129.571 126.736,129.454 126.853,129.337 126.979,129.337 127.032,129.391 127.032,129.517 126.916,129.633 126.799,129.75 126.799,129.876 126.853,129.93 126.979,129.93 127.095,129.813 127.212,129.696 127.338,129.696 127.392,129.75 127.392,129.876 127.275,129.993 127.158,130.109 127.158,130.235 127.212,130.289 127.338,130.289 127.454,130.172 127.571,130.056 127.697,130.056 127.751,130.109 127.751,130.235 127.697,130.289 127.697,130.415 127.724,130.442 127.918,130.636 P4.8@135.575,130.636
  Bottom Layer w0.127: v1(79.223,122.2) P1.46@80.9,122.2
R16: P1.27 P3.7 | length 69.9
  Top Layer w0.127: v1(86.377,129.4) 108.318,129.4 110.236,131.318 110.254,131.336 110.254,131.48 110.218,131.516 110.218,131.659 110.254,131.695 110.398,131.695 110.505,131.587 110.613,131.48 110.757,131.48 110.793,131.516 110.793,131.659 110.685,131.767 110.577,131.875 110.577,132.018 110.613,132.054 110.757,132.054 110.865,131.947 110.972,131.839 111.116,131.839 111.152,131.875 111.152,132.018 111.044,132.126 110.936,132.234 110.936,132.378 110.972,132.414 111.116,132.414 111.224,132.306 111.332,132.198 111.475,132.198 111.511,132.234 111.511,132.378 111.403,132.485 111.296,132.593 111.296,132.737 111.332,132.773 111.475,132.773 111.583,132.665 111.691,132.557 111.834,132.557 111.87,132.593 111.87,132.737 111.763,132.845 111.655,132.952 111.655,133.096 111.691,133.132 111.834,133.132 111.942,133.024 112.05,132.916 112.194,132.916 112.23,132.952 112.23,133.096 112.122,133.204 112.014,133.312 112.014,133.455 112.05,133.491 112.194,133.491 112.301,133.383 112.409,133.276 112.553,133.276 112.589,133.312 112.589,133.455 112.481,133.563 112.373,133.671 112.373,133.815 112.409,133.85 112.553,133.85 112.661,133.743 112.768,133.635 112.912,133.635 112.948,133.671 112.948,133.815 112.84,133.922 112.733,134.03 112.733,134.174 112.768,134.21 112.912,134.21 113.02,134.102 113.128,133.994 113.271,133.994 113.307,134.03 113.307,134.174 113.199,134.281 113.092,134.389 113.092,134.533 113.128,134.569 113.271,134.569 113.379,134.461 113.487,134.353 113.631,134.353 113.666,134.389 113.666,134.533 113.559,134.641 113.451,134.748 113.451,134.892 113.487,134.928 113.631,134.928 113.738,134.82 113.846,134.713 113.99,134.713 114.026,134.748 114.026,134.892 113.918,135 113.81,135.108 113.81,135.251 113.846,135.287 113.99,135.287 114.098,135.18 114.205,135.072 114.349,135.072 114.385,135.108 114.385,135.251 114.277,135.359 114.169,135.467 114.169,135.611 114.205,135.646 114.349,135.646 114.457,135.539 114.564,135.431 114.708,135.431 114.744,135.467 114.744,135.611 114.636,135.718 114.529,135.826 114.529,135.97 114.564,136.006 114.708,136.006 114.816,135.898 114.924,135.79 115.067,135.79 115.103,135.826 115.103,135.97 114.996,136.078 114.888,136.185 114.888,136.329 114.924,136.365 115.067,136.365 115.175,136.257 115.283,136.149 115.427,136.149 115.463,136.185 115.463,136.329 115.427,136.365 115.427,136.509 116.103,137.185 128.217,149.299 P3.7@135.592,149.299
  Bottom Layer w0.127: P1.27@84.7,129.4 v1(86.377,129.4)
R17: P1.28 P3.8 | length 70
  Top Layer w0.127: v1(82.35,129.425) 83.804,129.425 84.375,128.854 108.864,128.854 123.139,143.129 124.95,144.94 125.075,144.94 125.129,144.886 125.255,144.886 125.309,144.94 125.309,145.065 125.192,145.182 125.075,145.299 125.075,145.424 125.129,145.478 125.255,145.478 125.372,145.362 125.489,145.245 125.614,145.245 125.668,145.299 125.668,145.424 125.551,145.541 125.435,145.658 125.435,145.784 125.489,145.838 125.614,145.838 125.731,145.721 125.848,145.604 125.973,145.604 126.027,145.658 126.027,145.784 125.911,145.9 125.794,146.017 125.794,146.143 125.848,146.197 125.973,146.197 126.09,146.08 126.207,145.963 126.333,145.963 126.387,146.017 126.387,146.143 126.27,146.26 126.153,146.376 126.153,146.502 126.207,146.556 126.333,146.556 126.449,146.439 126.566,146.323 126.692,146.323 126.746,146.376 126.746,146.502 126.629,146.619 126.512,146.736 126.512,146.861 126.566,146.915 126.692,146.915 126.809,146.798 126.925,146.682 127.051,146.682 127.105,146.736 127.105,146.861 126.988,146.978 126.872,147.095 126.872,147.221 126.925,147.274 127.051,147.274 127.168,147.158 127.285,147.041 127.41,147.041 127.464,147.095 127.464,147.221 127.347,147.337 127.231,147.454 127.231,147.58 127.285,147.634 127.41,147.634 127.527,147.517 127.644,147.4 127.77,147.4 127.823,147.454 127.823,147.58 127.707,147.696 127.59,147.813 127.59,147.939 127.644,147.993 127.77,147.993 127.886,147.876 128.003,147.759 128.129,147.759 128.183,147.813 128.183,147.939 128.129,147.993 128.129,148.119 128.156,148.145 128.809,148.799 P3.8@135.592,148.799
  Bottom Layer w0.127: P1.28@80.9,129.4 80.925,129.425 v1(82.35,129.425)
R18: P1.12 P2.12 | length 64.9
  Top Layer w0.127: v1(82.225,135.8) 84.575,135.8 85.117,135.258 102.975,135.258 109.88,142.164 110.873,143.156 110.98,143.156 111.052,143.084 111.16,143.084 111.232,143.156 111.232,143.264 111.106,143.39 110.98,143.515 110.98,143.623 111.052,143.695 111.16,143.695 111.286,143.569 111.412,143.443 111.519,143.443 111.591,143.515 111.591,143.623 111.465,143.749 111.34,143.875 111.34,143.982 111.412,144.054 111.519,144.054 111.645,143.928 111.771,143.803 111.878,143.803 111.95,143.875 111.95,143.982 111.825,144.108 111.699,144.234 111.699,144.341 111.771,144.413 111.878,144.413 112.004,144.288 112.13,144.162 112.238,144.162 112.31,144.234 112.31,144.341 112.184,144.467 112.058,144.593 112.058,144.701 112.13,144.773 112.238,144.773 112.363,144.647 112.489,144.521 112.597,144.521 112.669,144.593 112.669,144.701 112.543,144.826 112.417,144.952 112.417,145.06 112.489,145.132 112.597,145.132 112.723,145.006 112.848,144.88 112.956,144.88 113.028,144.952 113.028,145.06 112.902,145.186 112.777,145.311 112.777,145.419 112.848,145.491 112.956,145.491 113.082,145.365 113.208,145.24 113.315,145.24 113.387,145.311 113.387,145.419 113.261,145.545 113.136,145.671 113.136,145.778 113.208,145.85 113.315,145.85 113.441,145.724 113.567,145.599 113.675,145.599 113.746,145.671 113.746,145.778 113.621,145.904 113.495,146.03 113.495,146.138 113.567,146.209 113.675,146.209 113.8,146.084 113.926,145.958 114.034,145.958 114.106,146.03 114.106,146.138 113.98,146.263 113.854,146.389 113.854,146.497 113.926,146.569 114.034,146.569 114.159,146.443 114.285,146.317 114.393,146.317 114.465,146.389 114.465,146.497 114.339,146.622 114.213,146.748 114.213,146.856 114.285,146.928 114.393,146.928 114.519,146.802 114.644,146.676 114.752,146.676 114.824,146.748 114.824,146.856 114.698,146.982 114.573,147.107 114.573,147.215 114.644,147.287 114.752,147.287 114.878,147.161 115.004,147.036 115.111,147.036 115.183,147.107 115.183,147.215 115.057,147.341 114.932,147.467 114.932,147.574 115.004,147.646 115.111,147.646 115.237,147.52 115.363,147.395 115.471,147.395 115.542,147.467 115.542,147.574 115.471,147.646 115.471,147.754 115.506,147.79 124.803,157.087 P2.12@124.803,158.427
  Bottom Layer w0.127: P1.12@80.9,135.8 v1(82.225,135.8)
T10: P1.58 P4.20 | length 64.9
  Top Layer w0.127: v1(79.223,117.4) 82.549,117.4 83.839,116.109 126.625,116.109 132.347,121.831 133.067,122.551 133.174,122.551 133.246,122.479 133.354,122.479 133.426,122.551 133.426,122.659 133.3,122.785 133.174,122.91 133.174,123.018 133.246,123.09 133.354,123.09 133.48,122.964 133.605,122.838 133.713,122.838 133.785,122.91 133.785,123.018 133.659,123.144 133.534,123.269 133.534,123.377 133.605,123.449 133.713,123.449 133.839,123.323 133.965,123.198 134.072,123.198 134.144,123.269 134.144,123.377 134.019,123.503 133.893,123.629 133.893,123.736 133.965,123.808 134.072,123.808 134.198,123.683 134.324,123.557 134.432,123.557 134.504,123.629 134.504,123.736 134.432,123.808 134.432,123.916 134.468,123.952 135.152,124.636 P4.20@135.575,124.636
  Bottom Layer w0.127: v1(79.223,117.4) P1.58@80.9,117.4
T11: P1.57 P4.19 | length 64.7
  Top Layer w0.127: v1(83.236,117.45) 83.49,117.196 126.543,117.196 126.975,117.627 127.011,117.663 127.011,117.771 126.939,117.843 126.939,117.951 127.011,118.023 127.118,118.023 127.244,117.897 127.37,117.771 127.477,117.771 127.549,117.843 127.549,117.951 127.424,118.076 127.298,118.202 127.298,118.31 127.37,118.382 127.477,118.382 127.603,118.256 127.729,118.13 127.837,118.13 127.909,118.202 127.909,118.31 127.783,118.436 127.657,118.561 127.657,118.669 127.729,118.741 127.837,118.741 127.962,118.615 128.088,118.49 128.196,118.49 128.268,118.561 128.268,118.669 128.142,118.795 128.016,118.921 128.016,119.028 128.088,119.1 128.196,119.1 128.322,118.974 128.447,118.849 128.555,118.849 128.627,118.921 128.627,119.028 128.501,119.154 128.376,119.28 128.376,119.388 128.447,119.459 128.555,119.459 128.681,119.334 128.807,119.208 128.914,119.208 128.986,119.28 128.986,119.388 128.86,119.513 128.735,119.639 128.735,119.747 128.807,119.819 128.914,119.819 129.04,119.693 129.166,119.567 129.274,119.567 129.345,119.639 129.345,119.747 129.22,119.872 129.094,119.998 129.094,120.106 129.166,120.178 129.274,120.178 129.399,120.052 129.525,119.926 129.633,119.926 129.705,119.998 129.705,120.106 129.579,120.232 129.453,120.357 129.453,120.465 129.525,120.537 129.633,120.537 129.758,120.411 129.884,120.286 129.992,120.286 130.064,120.357 130.064,120.465 129.938,120.591 129.812,120.717 129.812,120.824 129.884,120.896 129.992,120.896 130.118,120.77 130.243,120.645 130.351,120.645 130.423,120.717 130.423,120.824 130.351,120.896 130.351,121.004 131,121.653 134.483,125.136 P4.19@135.575,125.136
  Bottom Layer w0.127: v1(83.236,117.45) 84.65,117.45 P1.57@84.7,117.4
T12: P1.55 P4.17 | length 65
  Top Layer w0.127: v1(86.377,118.2) 125.414,118.2 125.641,118.427 125.677,118.463 125.677,118.571 125.605,118.643 125.605,118.751 125.677,118.823 125.785,118.823 125.911,118.697 126.036,118.571 126.144,118.571 126.216,118.643 126.216,118.751 126.09,118.877 125.964,119.002 125.964,119.11 126.036,119.182 126.144,119.182 126.27,119.056 126.395,118.93 126.503,118.93 126.575,119.002 126.575,119.11 126.449,119.236 126.324,119.361 126.324,119.469 126.395,119.541 126.503,119.541 126.629,119.415 126.755,119.29 126.862,119.29 126.934,119.361 126.934,119.469 126.809,119.595 126.683,119.721 126.683,119.828 126.755,119.9 126.862,119.9 126.988,119.775 127.114,119.649 127.222,119.649 127.293,119.721 127.293,119.828 127.168,119.954 127.042,120.08 127.042,120.188 127.114,120.259 127.222,120.259 127.347,120.134 127.473,120.008 127.581,120.008 127.653,120.08 127.653,120.188 127.527,120.313 127.401,120.439 127.401,120.547 127.473,120.619 127.581,120.619 127.707,120.493 127.832,120.367 127.94,120.367 128.012,120.439 128.012,120.547 127.886,120.673 127.76,120.798 127.76,120.906 127.832,120.978 127.94,120.978 128.066,120.852 128.191,120.726 128.299,120.726 128.371,120.798 128.371,120.906 128.245,121.032 128.12,121.157 128.12,121.265 128.191,121.337 128.299,121.337 128.425,121.211 128.551,121.086 128.658,121.086 128.73,121.157 128.73,121.265 128.605,121.391 128.479,121.517 128.479,121.624 128.551,121.696 128.658,121.696 128.784,121.571 128.91,121.445 129.018,121.445 129.09,121.517 129.09,121.624 128.964,121.75 128.838,121.876 128.838,121.984 128.91,122.056 129.018,122.056 129.143,121.93 129.269,121.804 129.377,121.804 129.449,121.876 129.449,121.984 129.323,122.109 129.197,122.235 129.197,122.343 129.269,122.415 129.377,122.415 129.503,122.289 129.628,122.163 129.736,122.163 129.808,122.235 129.808,122.343 129.682,122.469 129.556,122.594 129.556,122.702 129.628,122.774 129.736,122.774 129.862,122.648 129.988,122.522 130.095,122.522 130.167,122.594 130.167,122.702 130.041,122.828 129.916,122.954 129.916,123.061 129.988,123.133 130.095,123.133 130.221,123.007 130.347,122.882 130.455,122.882 130.526,122.954 130.526,123.061 130.455,123.133 130.455,123.241 130.899,123.685 133.35,126.136 P4.17@135.575,126.136
  Bottom Layer w0.127: P1.55@84.7,118.2 v1(86.377,118.2)
T14: P1.51 P4.13 | length 64.7
  Top Layer w0.127: v1(86.377,119.8) 122.518,119.8 122.771,120.053 122.798,120.08 122.798,120.206 122.744,120.26 122.744,120.385 122.798,120.439 122.924,120.439 123.04,120.323 123.157,120.206 123.283,120.206 123.337,120.26 123.337,120.385 123.22,120.502 123.103,120.619 123.103,120.745 123.157,120.798 123.283,120.798 123.4,120.682 123.516,120.565 123.642,120.565 123.696,120.619 123.696,120.745 123.579,120.861 123.462,120.978 123.462,121.104 123.516,121.158 123.642,121.158 123.759,121.041 123.875,120.924 124.001,120.924 124.055,120.978 124.055,121.104 123.938,121.221 123.822,121.337 123.822,121.463 123.875,121.517 124.001,121.517 124.118,121.4 124.235,121.283 124.36,121.283 124.414,121.337 124.414,121.463 124.298,121.58 124.181,121.696 124.181,121.822 124.235,121.876 124.36,121.876 124.477,121.759 124.594,121.643 124.72,121.643 124.773,121.696 124.773,121.822 124.657,121.939 124.54,122.056 124.54,122.181 124.594,122.235 124.72,122.235 124.836,122.119 124.953,122.002 125.079,122.002 125.133,122.056 125.133,122.181 125.016,122.298 124.899,122.415 124.899,122.541 124.953,122.595 125.079,122.595 125.196,122.478 125.312,122.361 125.438,122.361 125.492,122.415 125.492,122.541 125.375,122.657 125.258,122.774 125.258,122.9 125.312,122.954 125.438,122.954 125.555,122.837 125.672,122.72 125.797,122.72 125.851,122.774 125.851,122.9 125.734,123.017 125.618,123.133 125.618,123.259 125.672,123.313 125.797,123.313 125.914,123.196 126.031,123.079 126.156,123.079 126.21,123.133 126.21,123.259 126.094,123.376 125.977,123.493 125.977,123.618 126.031,123.672 126.156,123.672 126.273,123.555 126.39,123.439 126.516,123.439 126.57,123.493 126.57,123.618 126.453,123.735 126.336,123.852 126.336,123.977 126.39,124.031 126.516,124.031 126.632,123.915 126.749,123.798 126.875,123.798 126.929,123.852 126.929,123.977 126.812,124.094 126.695,124.211 126.695,124.337 126.749,124.391 126.875,124.391 126.992,124.274 127.108,124.157 127.234,124.157 127.288,124.211 127.288,124.337 127.171,124.453 127.054,124.57 127.054,124.696 127.108,124.75 127.234,124.75 127.351,124.633 127.468,124.516 127.593,124.516 127.647,124.57 127.647,124.696 127.593,124.75 127.593,124.875 128.219,125.501 130.854,128.136 P4.13@135.575,128.136
  Bottom Layer w0.127: P1.51@84.7,119.8 v1(86.377,119.8)
T15: P1.52 P4.14 | length 64.8
  Top Layer w0.127: v1(82.3,119.8) 83.403,119.8 83.925,119.278 123.088,119.278 126.505,122.695 128.203,124.393 128.203,124.518 128.149,124.572 128.149,124.698 128.203,124.752 128.328,124.752 128.445,124.635 128.562,124.518 128.688,124.518 128.742,124.572 128.742,124.698 128.625,124.815 128.508,124.932 128.508,125.057 128.562,125.111 128.688,125.111 128.804,124.994 128.921,124.878 129.047,124.878 129.101,124.932 129.101,125.057 128.984,125.174 128.867,125.291 128.867,125.417 128.921,125.47 129.047,125.47 129.164,125.354 129.28,125.237 129.406,125.237 129.46,125.291 129.46,125.417 129.343,125.533 129.227,125.65 129.227,125.776 129.28,125.83 129.406,125.83 129.523,125.713 129.64,125.596 129.765,125.596 129.819,125.65 129.819,125.776 129.702,125.892 129.586,126.009 129.586,126.135 129.64,126.189 129.765,126.189 129.882,126.072 129.999,125.955 130.125,125.955 130.178,126.009 130.178,126.135 130.062,126.252 129.945,126.368 129.945,126.494 129.999,126.548 130.125,126.548 130.241,126.431 130.358,126.315 130.484,126.315 130.538,126.368 130.538,126.494 130.421,126.611 130.304,126.728 130.304,126.853 130.358,126.907 130.484,126.907 130.6,126.79 130.717,126.674 130.843,126.674 130.897,126.728 130.897,126.853 130.78,126.97 130.663,127.087 130.663,127.213 130.717,127.266 130.843,127.266 130.96,127.15 131.076,127.033 131.202,127.033 131.256,127.087 131.256,127.213 131.202,127.266 131.202,127.392 131.229,127.419 131.446,127.636 P4.14@135.575,127.636
  Bottom Layer w0.127: P1.52@80.9,119.8 80.99,119.71 81.08,119.8 v1(82.3,119.8)
T16: P1.37 P3.17 | length 69.8
  Top Layer w0.127: v1(83.35,125.375) 114.478,125.375 116.395,127.292 116.422,127.319 116.422,127.445 116.369,127.499 116.369,127.624 116.422,127.678 116.548,127.678 116.665,127.562 116.782,127.445 116.907,127.445 116.961,127.499 116.961,127.624 116.845,127.741 116.728,127.858 116.728,127.984 116.782,128.037 116.907,128.037 117.024,127.921 117.141,127.804 117.267,127.804 117.32,127.858 117.32,127.984 117.204,128.1 117.087,128.217 117.087,128.343 117.141,128.397 117.267,128.397 117.383,128.28 117.5,128.163 117.626,128.163 117.68,128.217 117.68,128.343 117.563,128.46 117.446,128.576 117.446,128.702 117.5,128.756 117.626,128.756 117.743,128.639 117.859,128.522 117.985,128.522 118.039,128.576 118.039,128.702 117.922,128.819 117.805,128.935 117.805,129.061 117.859,129.115 117.985,129.115 118.102,128.998 118.218,128.882 118.344,128.882 118.398,128.935 118.398,129.061 118.281,129.178 118.165,129.295 118.165,129.42 118.218,129.474 118.344,129.474 118.461,129.358 118.578,129.241 118.703,129.241 118.757,129.295 118.757,129.42 118.641,129.537 118.524,129.654 118.524,129.78 118.578,129.834 118.703,129.834 118.82,129.717 118.937,129.6 119.063,129.6 119.117,129.654 119.117,129.78 119,129.896 118.883,130.013 118.883,130.139 118.937,130.193 119.063,130.193 119.179,130.076 119.296,129.959 119.422,129.959 119.476,130.013 119.476,130.139 119.359,130.256 119.242,130.372 119.242,130.498 119.296,130.552 119.422,130.552 119.539,130.435 119.655,130.318 119.781,130.318 119.835,130.372 119.835,130.498 119.718,130.615 119.601,130.732 119.601,130.857 119.655,130.911 119.781,130.911 119.898,130.794 120.015,130.678 120.14,130.678 120.194,130.732 120.194,130.857 120.077,130.974 119.961,131.091 119.961,131.216 120.015,131.27 120.14,131.27 120.194,131.216 120.32,131.216 123.05,133.947 133.426,144.323 135.568,144.323 P3.17@135.592,144.299
  Bottom Layer w0.127: v1(83.35,125.375) 84.675,125.375 P1.37@84.7,125.4
T17: P1.11 P2.11 | length 64.8
  Top Layer w0.127: v1(86.377,135.8) 102.577,135.8 102.832,136.055 102.868,136.091 102.868,136.199 102.796,136.271 102.796,136.378 102.868,136.45 102.976,136.45 103.101,136.325 103.227,136.199 103.335,136.199 103.407,136.271 103.407,136.378 103.281,136.504 103.155,136.63 103.155,136.738 103.227,136.809 103.335,136.809 103.461,136.684 103.586,136.558 103.694,136.558 103.766,136.63 103.766,136.738 103.64,136.863 103.514,136.989 103.514,137.097 103.586,137.169 103.694,137.169 103.82,137.043 103.945,136.917 104.053,136.917 104.125,136.989 104.125,137.097 103.999,137.223 103.874,137.348 103.874,137.456 103.945,137.528 104.053,137.528 104.179,137.402 104.305,137.276 104.412,137.276 104.484,137.348 104.484,137.456 104.359,137.582 104.233,137.707 104.233,137.815 104.305,137.887 104.412,137.887 104.538,137.761 104.664,137.636 104.772,137.636 104.843,137.707 104.843,137.815 104.718,137.941 104.592,138.067 104.592,138.174 104.664,138.246 104.772,138.246 104.897,138.121 105.023,137.995 105.131,137.995 105.203,138.067 105.203,138.174 105.077,138.3 104.951,138.426 104.951,138.534 105.023,138.605 105.131,138.605 105.257,138.48 105.382,138.354 105.49,138.354 105.562,138.426 105.562,138.534 105.436,138.659 105.31,138.785 105.31,138.893 105.382,138.965 105.49,138.965 105.616,138.839 105.742,138.713 105.849,138.713 105.921,138.785 105.921,138.893 105.795,139.019 105.67,139.144 105.67,139.252 105.742,139.324 105.849,139.324 105.975,139.198 106.101,139.072 106.208,139.072 106.28,139.144 106.28,139.252 106.155,139.378 106.029,139.504 106.029,139.611 106.101,139.683 106.208,139.683 106.334,139.557 106.46,139.432 106.568,139.432 106.64,139.504 106.64,139.611 106.514,139.737 106.388,139.863 106.388,139.97 106.46,140.042 106.568,140.042 106.693,139.917 106.819,139.791 106.927,139.791 106.999,139.863 106.999,139.97 106.873,140.096 106.747,140.222 106.747,140.33 106.819,140.402 106.927,140.402 107.053,140.276 107.178,140.15 107.286,140.15 107.358,140.222 107.358,140.33 107.232,140.455 107.107,140.581 107.107,140.689 107.178,140.761 107.286,140.761 107.412,140.635 107.538,140.509 107.645,140.509 107.717,140.581 107.717,140.689 107.591,140.815 107.466,140.94 107.466,141.048 107.538,141.12 107.645,141.12 107.771,140.994 107.897,140.869 108.005,140.869 108.076,140.94 108.076,141.048 107.951,141.174 107.825,141.3 107.825,141.407 107.897,141.479 108.005,141.479 108.13,141.353 108.256,141.228 108.364,141.228 108.436,141.3 108.436,141.407 108.31,141.533 108.184,141.659 108.184,141.767 108.256,141.838 108.364,141.838 108.489,141.713 108.615,141.587 108.723,141.587 108.795,141.659 108.795,141.767 108.669,141.892 108.543,142.018 108.543,142.126 108.615,142.198 108.723,142.198 108.849,142.072 108.974,141.946 109.082,141.946 109.154,142.018 109.154,142.126 109.028,142.251 108.903,142.377 108.903,142.485 108.974,142.557 109.082,142.557 109.208,142.431 109.334,142.305 109.441,142.305 109.513,142.377 109.513,142.485 109.441,142.557 109.441,142.665 111.874,145.097 115.037,148.26 115.519,148.26 124.303,157.044 P2.11@124.303,158.427
  Bottom Layer w0.127: P1.11@84.7,135.8 v1(86.377,135.8)